# Altium PCB SAS_UFL_Adapter1.PcbDoc
Units mil, origin at the board's own origin, x right, y up, seen from the top; angles counter-clockwise.
Board outline 6000 x 4000 mil, 2 copper layers (Top Layer, Bottom Layer); 9 components, 0 nets, 60 pads, 0 vias.
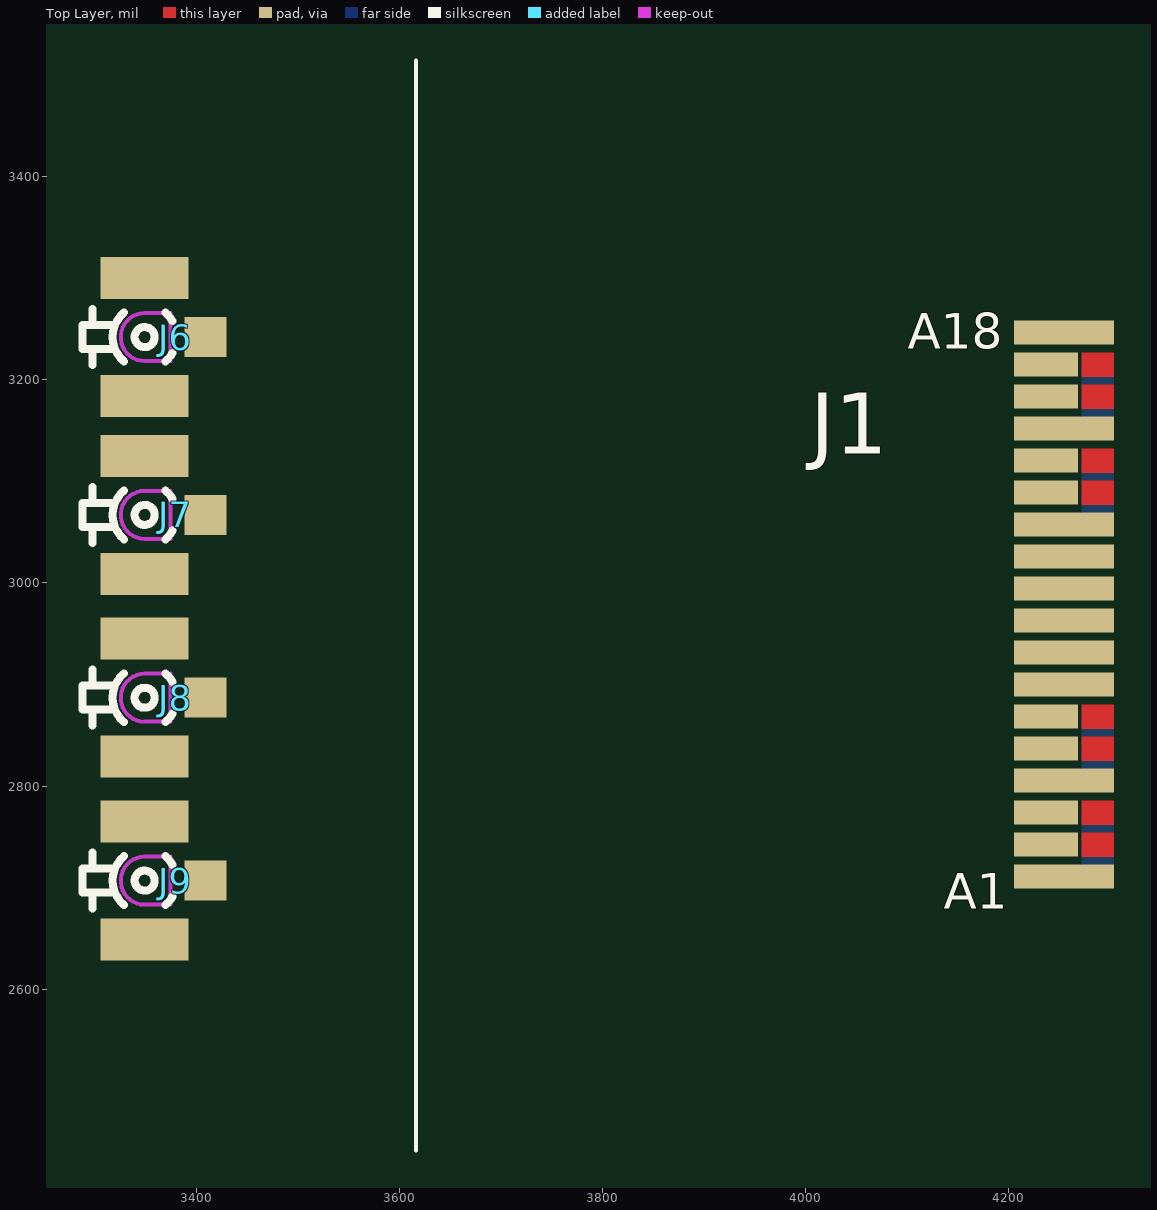
[diagram p0: Top Layer view]
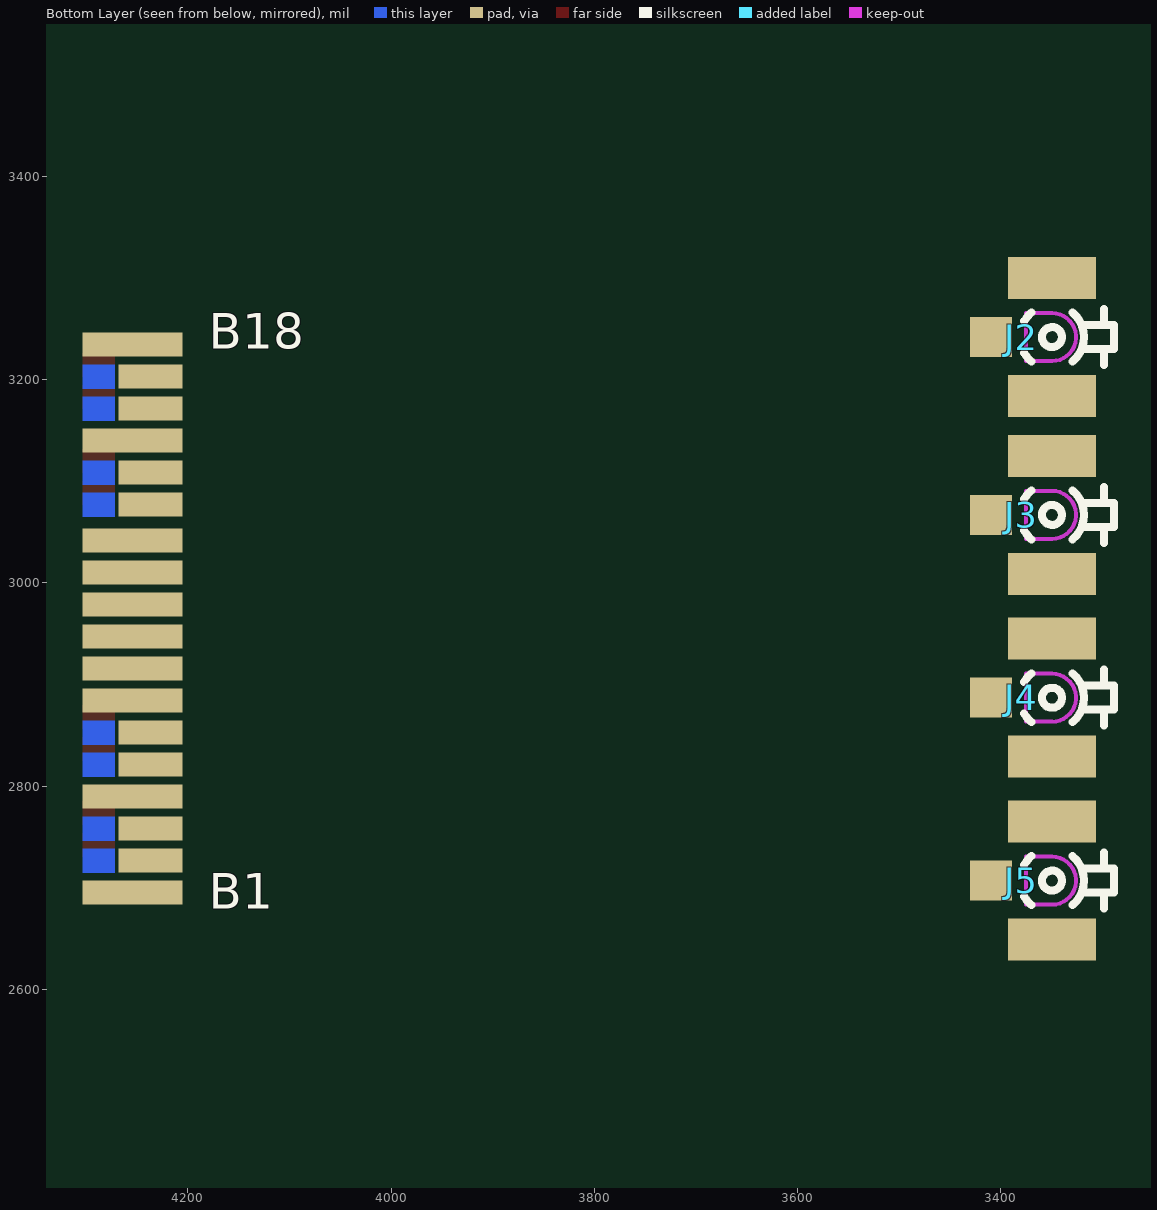
[diagram p1: Bottom Layer view, seen from below]

## Layer stack, top to bottom
Top Solder: solder mask 0.4, Solder Resist, Dk 3.5
Top Layer: signal copper 1.4
Dielectric 1: dielectric 12.6, FR-4, Dk 4.8
Bottom Layer: signal copper 1.4
Bottom Solder: solder mask 0.4, Solder Resist, Dk 3.5

## Board outline
1000,1000 7000,1000 7000,5000 1000,5000

## Design rules (kind name [scope] priority, off if disabled: settings)
Clearance [All] p1: gap=10 ignorepadtopadclearanceinfootprint=FALSE except(0: Arc-Hole Track-Hole SMDPad-Hole THPad-Hole Via-Hole Fill-Hole Poly-Hole Region-Hole Text-Hole)
PolygonConnect [All] p1: connectstyle=Relief reliefconductorwidth=10 reliefentries=4 polygonreliefangle="90 Angle" airgapwidth=10
RoomDefinition SAS_UFL_Adapter [InComponentClass('SAS_UFL_Adapter')] p1: confinementstyle=ConfineIn formatcopy=TRUE lockcomponents=FALSE outline 3560.59,1608.33 3659.45,1608.33 3659.45,2097.03 3560.59,2097.03
RoutingVias [All] p1: holewidth=28 width=50 viastyle="Through Hole" minholewidth=28 minwidth=50 maxholewidth=28 maxwidth=50
SolderMaskExpansion [All] p1: expansion=4 istentingtop=FALSE
Width [All] p1: maxlimit=10 minlimit=10 preferedwidth=10
30 further rules are at their usual default settings.

## Components (designator, comment, footprint, x,y, rotation, side; value= is the part's Value field where it differs from the comment)
J1 "mini-SAS" mini_SAS_PCB_EDGE 4245.43,2970.77 r0 top
J2 "U.FL" HIROSE_U.FL-R-SMT-1(10) 3349.45,3242.03 r270 bottom
J3 "U.FL" HIROSE_U.FL-R-SMT-1(10) 3349.45,3067.03 r270 bottom
J4 "U.FL" HIROSE_U.FL-R-SMT-1(10) 3349.45,2887.03 r270 bottom
J5 "U.FL" HIROSE_U.FL-R-SMT-1(10) 3349.45,2707.03 r270 bottom
J6 "U.FL" HIROSE_U.FL-R-SMT-1(10) 3349.45,3242.03 r90 top
J7 "U.FL" HIROSE_U.FL-R-SMT-1(10) 3349.45,3067.03 r90 top
J8 "U.FL" HIROSE_U.FL-R-SMT-1(10) 3349.45,2887.03 r90 top
J9 "U.FL" HIROSE_U.FL-R-SMT-1(10) 3349.45,2707.03 r90 top

## Footprints (in the part's own frame and the unit in brackets; to place one, negate y for a bottom-side part, rotate by r counter-clockwise, add the part's x,y. Pads: shape width x height; smd on the part's side, far side on the other; paste and mask are expansions set on the pad)
HIROSE_U.FL-R-SMT-1(10) [mm] "Up to 6GHz Ultra Small Surface Mount Male Coaxial Connectors U.FL Series"
  rect 1x1.05 smd: 1(0,-1.525)
  rect 1.05x2.2 smd: 2(-1.475,0) 2(1.475,0)
  Top Layer keep-out lines w0.1: 0.6,0 ccw(c0,0) -0.6,0 -0.6,-0.65 0.6,-0.65 0.6,0
  silkscreen extent -0.7,-0.69 0.7,1.55, body extent -1.5,-1.55 1.5,1.55, height 1.25
mini_SAS_PCB_EDGE [mm] "36 contacts Board Eddge mini SAS Connector"
  rect 2.5x0.6 smd far side paste-0.4: A1(0.225,-7) A4(0.225,-4.6) A7(0.225,-2.2) A8(0.225,-1.4) A9(0.225,-0.6) A10(0.225,0.2) A11(0.225,1) A12(0.225,1.8) A15(0.225,4.3) A18(0.225,6.7)
  rect 1.6x0.6 smd far side paste-0.4: A2(-0.225,-6.2) A3(-0.225,-5.4) A5(-0.225,-3.8) A6(-0.225,-3) A13(-0.225,2.7) A14(-0.225,3.5) A16(-0.225,5.1) A17(-0.225,5.9)
  rect 2.5x0.6 smd paste-0.4: B1(0.225,-6.6) B4(0.225,-4.2) B7(0.225,-1.8) B8(0.225,-1) B9(0.225,-0.2) B10(0.225,0.6) B11(0.225,1.4) B12(0.225,2.2) B15(0.225,4.6) B18(0.225,7)
  rect 1.6x0.6 smd paste-0.4: B2(-0.225,-5.8) B3(-0.225,-5) B5(-0.225,-3.4) B6(-0.225,-2.6) B13(-0.225,3) B14(-0.225,3.8) B16(-0.225,5.4) B17(-0.225,6.2)
  Top Layer region: 0.675,5.1 0.675,5.7 1.475,5.7 1.475,5.1
  Top Layer region: 0.675,5.9 0.675,6.5 1.475,6.5 1.475,5.9
  Top Layer region: 0.675,2.7 0.675,3.3 1.475,3.3 1.475,2.7
  Top Layer region: 0.675,3.5 0.675,4.1 1.475,4.1 1.475,3.5
  Top Layer region: 0.675,-3.7 0.675,-3.1 1.475,-3.1 1.475,-3.7
  Top Layer region: 0.675,-2.9 0.675,-2.3 1.475,-2.3 1.475,-2.9
  Top Layer region: 0.675,-5.3 0.675,-4.7 1.475,-4.7 1.475,-5.3
  Top Layer region: 0.675,-6.1 0.675,-5.5 1.475,-5.5 1.475,-6.1
  Bottom Layer region: 0.675,6.2 0.675,5.6 1.475,5.6 1.475,6.2
  Bottom Layer region: 0.675,5.4 0.675,4.8 1.475,4.8 1.475,5.4
  Bottom Layer region: 0.675,3 0.675,2.4 1.475,2.4 1.475,3
  Bottom Layer region: 0.675,3.8 0.675,3.2 1.475,3.2 1.475,3.8
  Bottom Layer region: 0.675,-3.5 0.675,-4.1 1.475,-4.1 1.475,-3.5
  Bottom Layer region: 0.675,-2.7 0.675,-3.3 1.475,-3.3 1.475,-2.7
  Bottom Layer region: 0.675,-5.9 0.675,-6.5 1.475,-6.5 1.475,-5.9
  Bottom Layer region: 0.675,-5.1 0.675,-5.7 1.475,-5.7 1.475,-5.1

## Part data
J1: "36 Position mini-SAS PCB Edge Connector 36 (2x18)", Manufacturer=PCB, Manufacturer Part Number="gold fingers", Part Number=mini_SAS_PCB_EDGE, Author=GK, Component Type=Standard, ComponentHeight=0, CreateDate=12.11.2014, Family=mini-SAS, HelpURL=\\cern.ch\dfs\Applications\Altium\Datasheets\MOLEX_75783-0107.pdf, LatestRevisionDate=12.11.2014, Mounted=No, Part Description="36 Position mini-SAS PCB Edge Connector 36 (2x18)", Pin Count=36, PressFit=No, Sense=No, SMD=Yes, Socket=No, Status=None
J2 J3 J4 J5 J6 J7 J8 J9: library part HIROSE_U.FL-R-SMT-1(10), Manufacturer="HIROSE (HRS)", Manufacturer Part Number=U.FL-R-SMT-1(10), Author="CERN DEM JLC", Component Type=Standard, ComponentHeight=1.25mm, CreateDate=24.03.2010, Family=U.FL, HelpURL=\\cern.ch\dfs\Applications\Altium\Datasheets\HIROSE_U.FL-R-SMT-1(10).pdf, LatestRevisionDate=24.03.2010, Mounted=Yes, Part Description="Up to 6GHz Ultra Small Surface Mount Male Coaxial Connectors U.FL Series", Part Number=HIROSE_U.FL-R-SMT-1(10), Pin Count=2, PressFit=No, Sense=No, SMD=Yes, Socket=No, Status=None

## Nets (pads, with @x,y where several pads share a name; then routed paths per layer and width w, separated by ;. In a path a pad name is that pad's centre, name@x,y a point inside that pad or via, vN(x,y) a via of type N, cw(c..) or ccw(c..) an arc to the next point about the centre after c; other vN are vias at no path point)
pads on no net: J1.A1 J1.A2 J1.A3 J1.A4 J1.A5 J1.A6 J1.A7 J1.A8 J1.A9 J1.A10 J1.A11 J1.A12 J1.A13 J1.A14 J1.A15 J1.A16 J1.A17 J1.A18 J1.B1 J1.B2 J1.B3 J1.B4 J1.B5 J1.B6 J1.B7 J1.B8 J1.B9 J1.B10 J1.B11 J1.B12 J1.B13 J1.B14 J1.B15 J1.B16 J1.B17 J1.B18 J2.1 J2.2 J3.1 J3.2 J4.1 J4.2 J5.1 J5.2 J6.1 J6.2 J7.1 J7.2 J8.1 J8.2 J9.1 J9.2

## Silkscreen, mask and mechanical layers (free items; w line width, h text height)
Top Overlay:
  lines w3.94: 3616.5,2441.24 3616.5,3514.07
Mechanical 1:
  lines w3.94: 2965.91,2592.32 3606.65,2592.32 3606.65,2644 3626.34,2663.68 3901.1,2663.68 3929.45,2692.03 3979.45,2692.03 4007.8,2663.68 4075.16,2663.68 4305.47,2663.68 4325.16,2683.37 4325.16,3257.18 4304.49,3277.85 4075.16,3277.85 4039.72,3277.85 4027.15,3265.28 3961.2,3265.28 3948.62,3277.85 3655.87,3277.85 3626.34,3277.85 3606.65,3297.54 3606.65,3348.23 2965.91,3348.23 2965.91,2592.32

## Text inside footprints (layer, text, board x,y; h text height)
J1: Top Overlay "A1" at 4136.18,2679.43 h35; Top Overlay "A18" at 4100.75,3230.61 h35; Bottom Overlay "B1" at 4179.49,2679.43 h35; Bottom Overlay "B18" at 4179.49,3230.61 h35